# Altium PCB EFR32xG27_BLE_AGR_REF_DES_A00.PcbDoc (part 1 of 2)
Units mil, origin at the board's own origin, x right, y up, seen from the top; angles counter-clockwise.
Board outline 1488.66 x 1256.89 mil, 2 copper layers (Top Layer, Bottom Layer), stack 38.548 mil thick; 113 components, 68 nets, 277 pads, 490 vias.
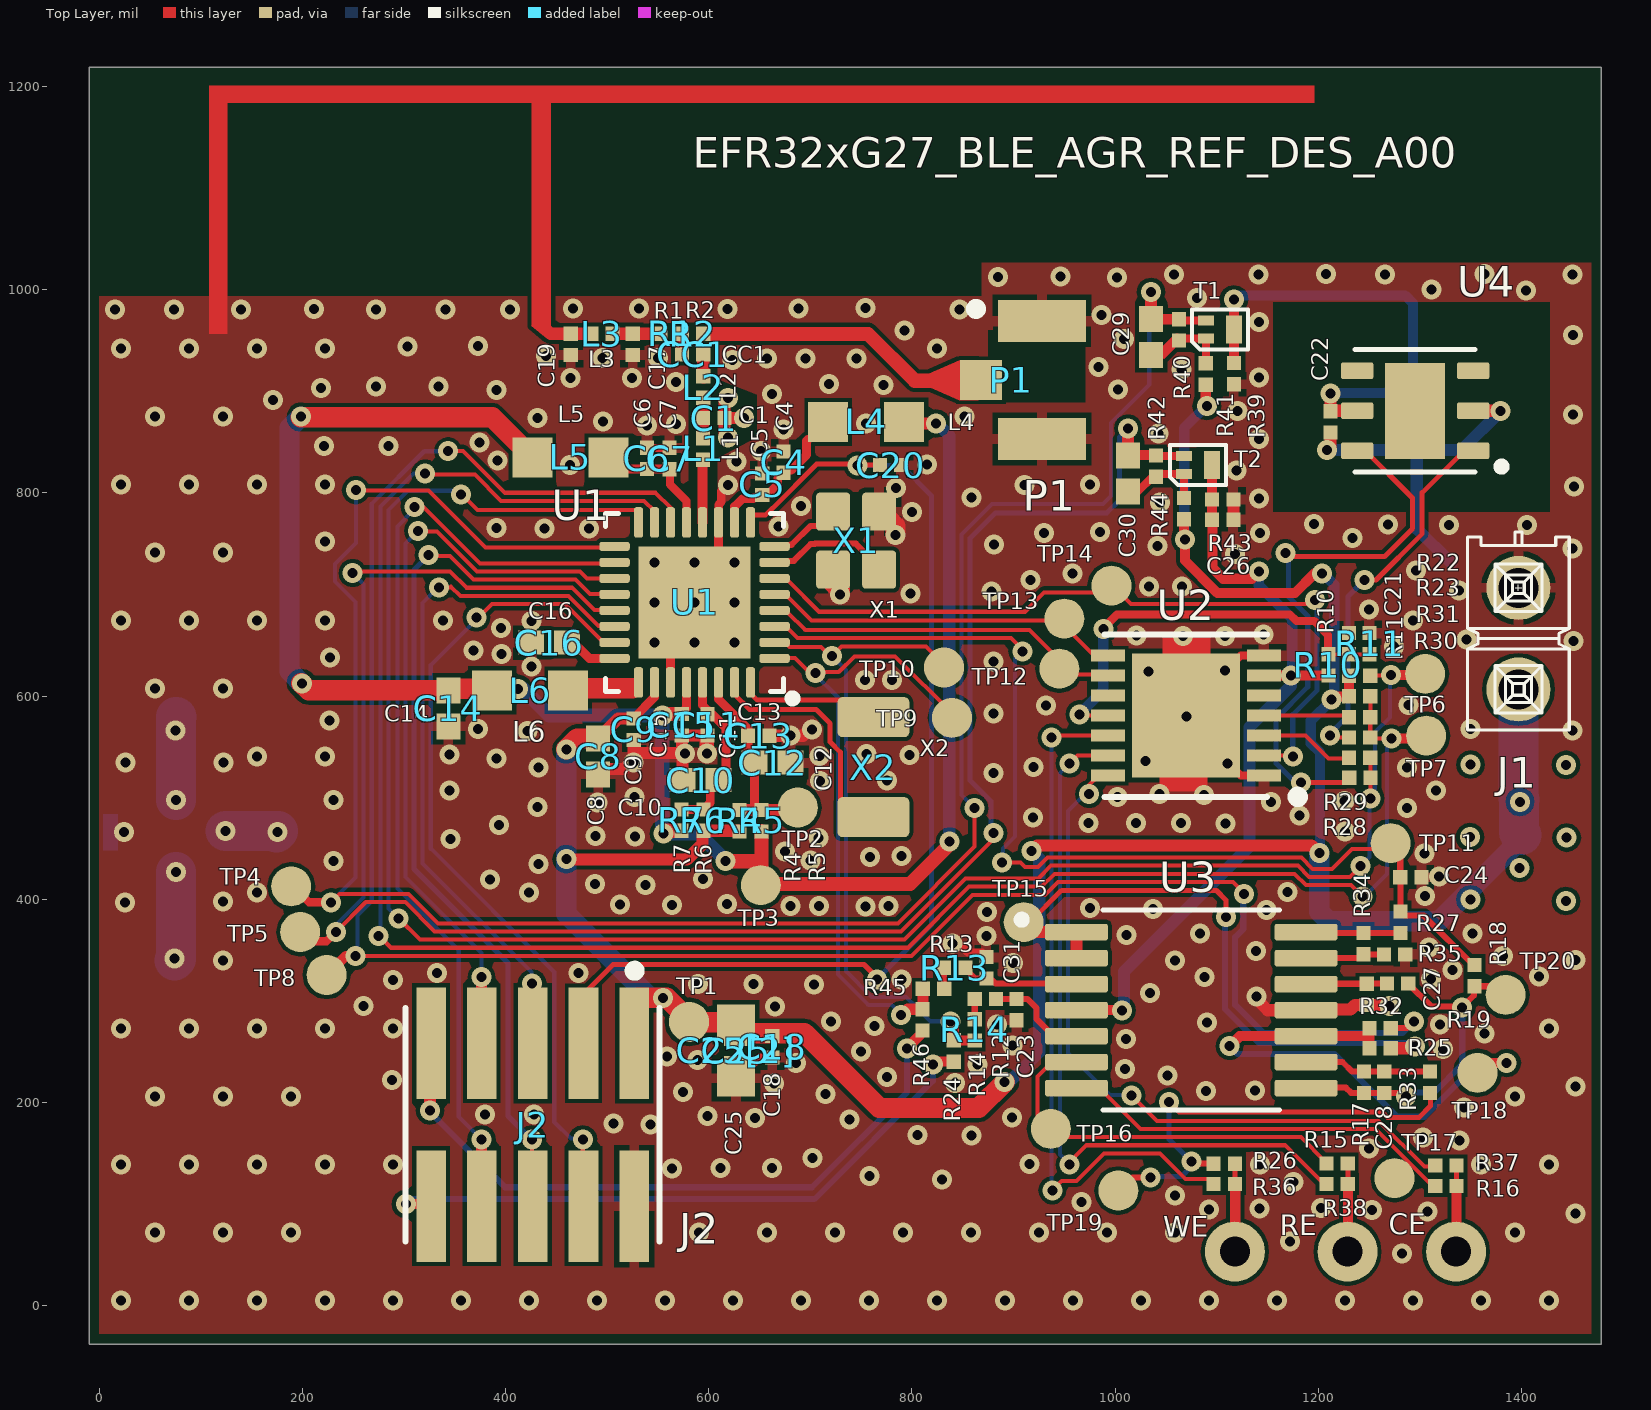
[diagram p0: Top Layer view]
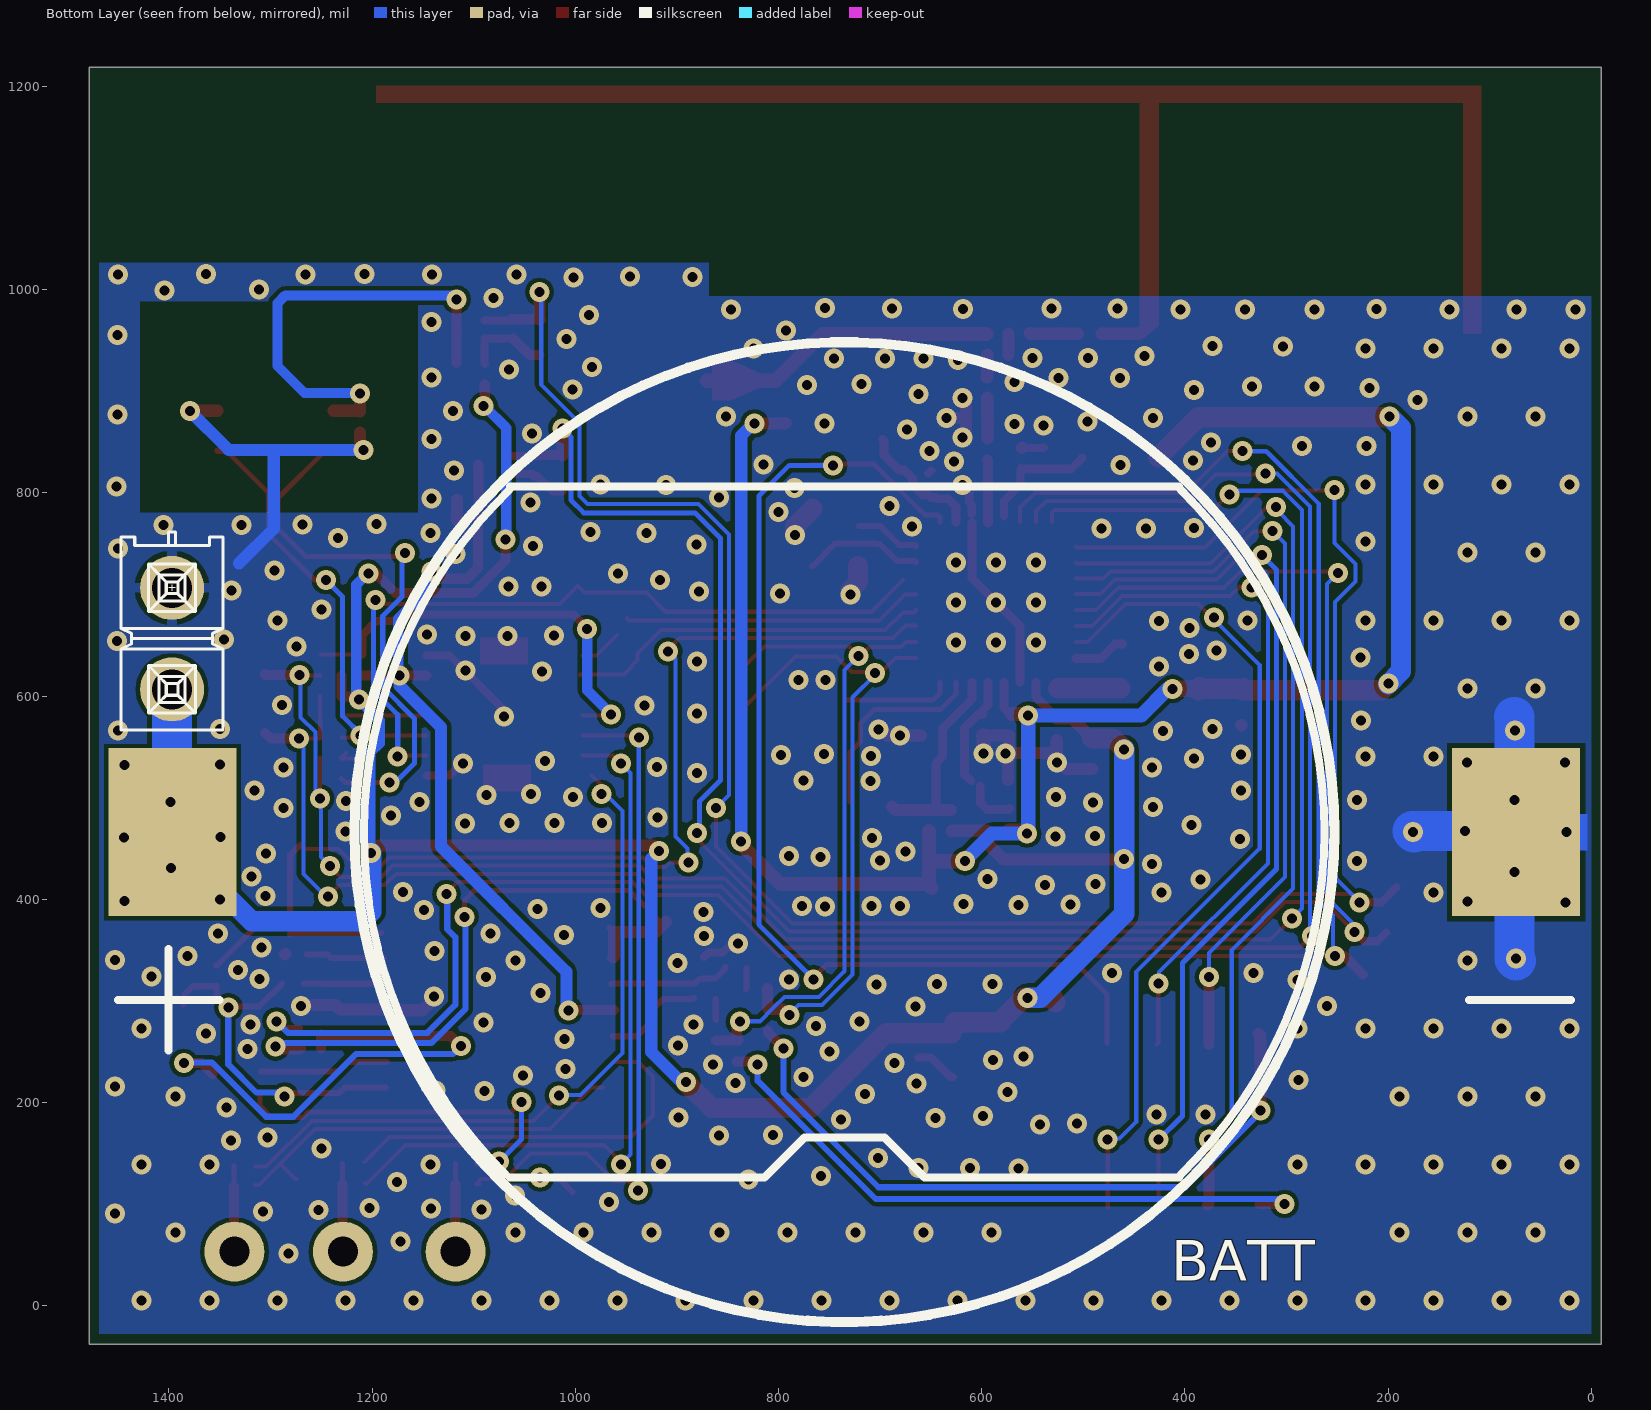
[diagram p1: Bottom Layer view, seen from below]

## Layer stack, top to bottom
Top Solder: solder mask 0.4, Solder Resist, Dk 3.5
Top Layer: signal copper 1.4
Dielectric 1: dielectric 35.748, FR-4, Dk 4.48
Bottom Layer: signal copper 1.4
Bottom Solder: solder mask 0.4, Solder Resist, Dk 3.5

## Board outline
-9.95,-37.71 -9.95,1219.18 1478.71,1219.18 1478.71,-37.71

## Design rules (kind name [scope] priority, off if disabled: settings)
AcuteAngle [All] p1: minimum=7.00000000000000E+0001 checktracksonly=FALSE
BoardOutlineClearance [All] p1: gap=0
Clearance Clearance_to_Antenna [InComponent('AT1')] p1: gap=0
Clearance Clearance_R3_R4 [InComponent('R3') vs InComponent('R4')] p2: gap=0
Clearance Clearance_to_Holes [InPadClass('NPTH')] p3: gap=10
Clearance Clearance_50Ohm [InNetClass('50Ohm') vs InNet('GND')] p4: gap=10 except(5.91: Track-SMDPad; 7.87: SMDPad-SMDPad)
Clearance Clearance_1 [All] p5: gap=4
Clearance Clerance_Polygon_GND [InNamedPolygon('GND1')] p6: gap=5
ComponentClearance ComponentClearance_C2_C7 [InComponent('C2') vs InComponent('C7')] p1: gap=0 collisioncheckmode=3 verticalgap=10 showdistances=FALSE
ComponentClearance ComponentClearance_BAT [InComponent('Designator1')] p2: gap=0 collisioncheckmode=3 verticalgap=0 showdistances=FALSE
ComponentClearance ComponentClearance_1 [InComponent('PCB1')] p3: gap=0 collisioncheckmode=3 verticalgap=0 showdistances=FALSE
ComponentClearance ComponentClearance_AT1_R14 [InComponent('AT1') vs InComponent('R14')] p4: gap=0 collisioncheckmode=3 verticalgap=0 showdistances=FALSE
ComponentClearance ComponentClearance_C6_R7 [InComponent('C6') vs InComponent('R7')] p5: gap=0 collisioncheckmode=3 verticalgap=0 showdistances=FALSE
ComponentClearance ComponentClearance_TP [HasFootprint('TP') vs HasFootprint('TP')] p6: gap=0 collisioncheckmode=3 verticalgap=0 showdistances=FALSE
ComponentClearance ComponentClearance_AT1 [InComponent('AT1')] p7: gap=0 collisioncheckmode=3 verticalgap=0 showdistances=FALSE
ComponentClearance ComponentClearance_R2_R3 [InComponent('R2') vs InComponent('R3')] p8: gap=0 collisioncheckmode=3 verticalgap=0 showdistances=FALSE
ComponentClearance ComponentClearance_R6_R7 [InComponent('R6') vs InComponent('R7')] p9: gap=0 collisioncheckmode=3 verticalgap=0 showdistances=FALSE
ComponentClearance ComponentClearance_R4_R5 [InComponent('R4') vs InComponent('R5')] p10: gap=0 collisioncheckmode=3 verticalgap=0 showdistances=FALSE
ComponentClearance [All] p11: gap=10 collisioncheckmode=3 verticalgap=10 showdistances=FALSE
HoleToHoleClearance HoleToHoleClearance_ANT1toPAD [InComponent('AT1') vs ISpad] p1: gap=0 allowstackedmicrovias=TRUE
HoleToHoleClearance HoleToHoleClearance_R3toR4_1 [Incomponent ('R3') vs Incomponent ('R4')] p2: gap=0 allowstackedmicrovias=TRUE
HoleToHoleClearance HoleToHoleClearance_U1toVIA_1 [InComponent ('U1') vs IsVia] p3: gap=0 allowstackedmicrovias=TRUE
HoleToHoleClearance [All] p4: gap=10 allowstackedmicrovias=TRUE
MinimumSolderMaskSliver MinimumSolderMaskSliver_U1 [InComponent('U1') vs InComponent('U1')] p1: minsoldermaskwidth=0
MinimumSolderMaskSliver [All] p2: minsoldermaskwidth=4
PolygonConnect PolygonConnect_ANT_GND [(InNet('gnd') AND InComponent('ANT'))] p1: connectstyle=Direct reliefconductorwidth=10 reliefentries=4 polygonreliefangle="90 Angle" airgapwidth=10
PolygonConnect Polygon_VIA_Connect [IsVia] p2: connectstyle=Direct reliefconductorwidth=10 reliefentries=4 polygonreliefangle="90 Angle" airgapwidth=10
PolygonConnect [All] p3: connectstyle=Relief reliefconductorwidth=10 reliefentries=4 polygonreliefangle="90 Angle" airgapwidth=5
RoutingVias [All] p1: holewidth=9.84 width=19.68 viastyle="Through Hole" minholewidth=9.84 minwidth=19.68 maxholewidth=39.37 maxwidth=59.06
ShortCircuit ShortCircuit_ANTtoPAD [InComponent('AT1') vs InNet('GND')] p1: allowed=TRUE
ShortCircuit ShortCircuit_R3toR4_1 [InComponent('R3') vs InComponent('R4')] p2: allowed=TRUE
ShortCircuit [All] p3: allowed=FALSE
SilkToSilkClearance [All] p1: silktosilkclearance=4
SilkToSolderMaskClearance [IsPad] p1: minsilkscreentomaskgap=4 clearancetoexposedcopper=TRUE
SolderMaskExpansion [All] p1: expansion=0
Width 50ohm [InNet('50R*')] p1: maxlimit=114.47 minlimit=3.94 preferedwidth=114.47
Width [All] p2: maxlimit=39.37 minlimit=4 preferedwidth=4.92 minimp=50.000000 maximp=50.000000 favimp=50.000000
24 further rules are at their usual default settings.

## Classes and differential pairs
polygon class GND1: "Top Layer-No Net"
component class EFR32xG27_BLE_AGR_REF_DES_A00_Sheet2: BATT C18 C21 C22 C23 C24 C25 C25[2] C26 C27 C28 C29 C30 C31 CE J1 J2 R10 R11 R12 R13 R14 R15 R16 R17 R18 R19 R22 R23 R24 R25 R26 R27 R28 R29 R30 R31 R32 R33 R34 R35 R36 R37 R38 R39 R40 R41 R42 R43 R44 R45 R46 RE T1 T2 TP3 TP4 TP5 TP6 TP7 TP8 TP9 TP10 TP11 TP12 TP13 TP14 TP15 TP16 TP17 TP18 TP19 TP20 U2 U3 U4 WE X2
component class EFR32xG27_BLE_AGR_REF_DES_A00_Sheet1: C1 C4 C5 C6 C7 C8 C9 C10 C11 C12 C13 C14 C15 C16 C17 C19 C20 CC1 L1 L2 L3 L4 L5 L6 P1 R1 R2 R4 R5 R6 R7 TP1 TP2 U1 X1

## Components (designator, comment, footprint, x,y, rotation, side; value= is the part's Value field where it differs from the comment)
BATT "BATTERY_HOLDER" BATTERY_HOLDER_CR2450_SMT_1052 735.26,466.06 r180 bottom
C1 "C1" 0201 594.44,873.7 r0 top
C4 "C4" 0201 673.61,819.72 r90 top
C5 "C5" 0201 652.71,798 r90 top
C6 "C6" 0201 539.21,823.47 r90 top
C7 "C7" 0201 561.51,823.34 r90 top
C8 "C8" C_0402 491.23,558.35 r180 top
C9 "C9" 0201 526.28,577.85 r270 top
C10 "C10" C_0402 609.64,517.34 r90 top
C11 "C11" 0201 598.71,582.19 r270 top
C12 "C12" C_0402 645.1,534.55 r270 top
C13 "C13" 0201 638.7,560.91 r0 top
C14 "C14" C_0402 343.69,605.62 r180 top
C15 "C15" 0201 573.46,582.29 r270 top
C16 "C16" C_0402 460.62,652.59 r90 top
C17 "C17" 0201 525.15,956.62 r270 top
C18 "C18" 0201 662.58,265.35 r270 top
C19 "C19" 0201 464.3,956.62 r270 top
C20 "" 0201 768.46,827.34 r0 top
C21 "C21" 0201 1230.24,641.13 r90 top
C22 "C22" 0201 1211.87,880.34 r270 top
C23 "C23" 0201 902.92,301.95 r270 top
C24 "C24" 0201 1280.65,421.72 r0 top
C25 "C25" C_0402 627.07,268.5 r180 top (schematic designator C25[1])
C25[2] "" C_0603 626.84,278.83 r270 top
C26 "C26" 0201 1095.44,773.63 r0 top
C27 "C27" 0201 1247.59,295.89 r90 top
C28 "C28" 0201 1264.84,230.42 r270 top
C29 "C29" C_0402 1035.52,935.59 r0 top
C30 "C30" C_0402 1012.78,801.38 r0 top
C31 "C31" 0201 873.32,322.08 r90 top
CC1 "CC1" 0201 594.59,936.22 r180 top
CE "Sensor Electrode" "Sensor Electrode"#1 1325.53,44.4 r0 top
J1 "J1" JUMPER_HDR_2.54MM 1397,706.54 r270 top
J2 "J2" SMTC-FTSH-105-01-L-DV-K_V 426.72,178.11 r180 top
L1 "L1" 0201 594.44,832.71 r90 top
L2 "L2" 0201 594.53,893.7 r90 top
L3 "L3" 0201 505.42,956.6 r180 top
L4 "L4" L_0603 792.38,869.82 r270 top
L5 "L5" L_0603 426.37,834.9 r90 top
L6 "L6" L_0603 461.59,605.66 r270 top
P1 "P1" TECO-1909763-1_V 928.01,911.05 r270 top
R1 "R1" 0201 573.58,956.66 r180 top
R2 "R2" 0201 573.6,956.67 r0 top
R4 "R4" 0201 630.21,466.85 r90 top
R5 "R5" 0201 652.03,466.86 r90 top
R6 "R6" 0201 594.84,467.4 r90 top
R7 "R7" 0201 573.18,467.45 r90 top
R10 "R10" 0201 1209.97,641.14 r270 top
R11 "R11" 0201 1250.4,662.12 r270 top
R12 "R12" 0201 861.85,301.98 r0 top
R13 "R13" 0201 831.7,332.52 r0 top
R14 "R14" 0201 861.74,261 r90 top
R15 "R15" 0201 1208.04,139.85 r0 top
R16 "R16" 0201 1314.99,117.9 r0 top
R17 "R17" 0201 1244.96,230.45 r270 top
R18 "R18" 0201 1353.61,314.38 r90 top
R19 "R19" 0201 1288.6,317.01 r180 top
R22 "R22" 0201 1251.14,620.08 r180 top
R23 "R23" 0201 1251.15,599.84 r180 top
R24 "R24" 0201 841.11,261.2 r270 top
R25 "R25" 0201 1271.3,253.37 r180 top
R26 "R26" 0201 1096.97,139.8 r0 top
R27 "R27" 0201 1280.89,366.93 r90 top
R28 "R28" 0201 1251.34,519.72 r180 top
R29 "R29" 0201 1251.2,539.3 r180 top
R30 "R30" 0201 1251.1,559.19 r180 top
R31 "R31" 0201 1251.1,579.27 r180 top
R32 "R32" 0201 1271.31,273.18 r180 top
R33 "R33" 0201 1309.8,209.4 r90 top
R34 "R34" 0201 1244.58,345.92 r90 top
R35 "R35" 0201 1285.61,345.67 r180 top
R36 "R36" 0201 1096.97,119.7 r0 top
R37 "R37" 0201 1314.99,138.08 r0 top
R38 "R38" 0201 1208.06,119.82 r0 top
R39 "R39" 0201 1116.93,906.9 r90 top
R40 "R40" 0201 1062.93,970.9 r270 top
R41 "R41" 0201 1089.27,927.54 r270 top
R42 "R42" 0201 1040.15,836.94 r270 top
R43 "R43" 0201 1116.41,793.6 r180 top
R44 "R44" 0201 1067.92,795.04 r270 top
R45 "R45" 0201 810.75,311.92 r0 top
R46 "R46" 0201 810.55,291.79 r270 top
RE "Sensor Electrode" "Sensor Electrode"#2 1218.78,47.68 r0 top
T1 "T1" SOT883_B_FIXED 1103.23,960.69 r0 top
T2 "T2" SOT883_B_FIXED 1081.63,827.38 r0 top
TP1 "TP_SMD" TP#1 580.64,279.3 r90 top
TP2 "TP_SMD" TP#2 643.45,515.52 r90 bottom
TP3 "TP_SMD" TP#1 651.23,413.97 r90 top
TP4 "TP_SMD" TP#1 189.09,412.73 r180 top
TP5 "TP_SMD" TP#1 197.89,367.76 r180 top
TP6 "TP_SMD" TP#1 1305.24,621.86 r180 top
TP7 "TP_SMD" TP#1 1306.17,561.05 r90 top
TP8 "TP_SMD" TP#1 223.95,325.53 r90 top
TP9 "TP_SMD" TP#1 839.43,578.62 r90 top
TP10 "TP_SMD" TP#1 831.55,628.09 r90 top
TP11 "TP_SMD" TP#1 1271.18,455.27 r90 top
TP12 "TP_SMD" TP#1 945.03,627 r90 top
TP13 "TP_SMD" TP#1 950.02,676.28 r90 top
TP14 "TP_SMD" TP#1 996.38,708.63 r90 top
TP15 "TP_SMD" TP#1 910.07,377.48 r90 top
TP16 "TP_SMD" TP#1 936.73,174.1 r90 top
TP17 "TP_SMD" TP#1 1275.02,125.56 r90 top
TP18 "TP_SMD" TP#1 1356.7,229.23 r90 top
TP19 "TP_SMD" TP#1 1003.18,113.31 r90 top
TP20 "TP_SMD" TP#1 1384.33,305.96 r90 top
U1 "U1" EFR_QFN32 586.06,692.21 r180 top
U2 "U2" SON50P400X400X80-15N 1069.7,580.83 r180 top
U3 "U3" SOP65P640X120-14N 1074.96,290.92 r0 top
U4 "U4" SON100P300X300X121-7N 1295.3,880.84 r180 top
WE "Sensor Electrode" "Sensor Electrode"#3 1107.83,48.18 r0 top
X1 "X1" HFXO_TZ2205E 767.77,724.46 r90 top
X2 "X2" LFXO 762.09,530.03 r270 top

## Footprints (in the part's own frame and the unit in brackets; to place one, negate y for a bottom-side part, rotate by r counter-clockwise, add the part's x,y. Pads: shape width x height; smd on the part's side, far side on the other; paste and mask are expansions set on the pad)
0201 [mil]
  rect 14x14 smd: 1(0,0) 2(21,0)
  body extent 1,-5 21,5, height 10
BATTERY_HOLDER_CR2450_SMT_1052 [mm] "CR2450 Battery Holder"
  rect 3.2x4.2 smd: 1(-16.795,0) 2(16.795,0)
  silkscreen extent -18.16,-12.25 18.16,12.25, body extent -13.46,-8 13.46,7.97, height 4.8
C_0402 [mm]
  rect 0.6x0.65 smd: 1(0,0) 2(0,0.9)
  body extent -0.28,-0.05 0.28,0.97, height 1.02
C_0603 [mm]
  rect 0.9x0.95 smd: 1(0,0) 2(1.4,0)
  body extent -0.09,-0.39 1.51,0.39, height 0.89
EFR_QFN32 [mm]
  rect 2.8x2.8 smd: 0(0,0)
  rrect50% 0.76x0.22 smd: 1(-2,1.4) 2(-2,1) 3(-2,0.6) 4(-2,0.2) 5(-2,-0.2) 6(-2,-0.6) 7(-2,-1) 8(-2,-1.4) 17(2,-1.4) 18(2,-1) 19(2,-0.6) 20(2,-0.2) 21(2,0.2) 22(2,0.6) 23(2,1) 24(2,1.4)
  rrect50% 0.22x0.76 smd: 9(-1.4,-2) 10(-1,-2) 11(-0.6,-2) 12(-0.2,-2) 13(0.2,-2) 14(0.6,-2) 15(1,-2) 16(1.4,-2) 25(1.4,2) 26(1,2) 27(0.6,2) 28(0.2,2) 29(-0.2,2) 30(-0.6,2) 31(-1,2) 32(-1.4,2)
  silkscreen extent -2.53,-2.22 2.22,2.48, body extent -2.08,-2.07 2.07,2.08, height 1
HFXO_TZ2205E [mm]
  rrect20% 0.95x0.85 smd: 1(1.45,1.15) 2(1.45,0) 3(0,0) 4(0,1.15)
  body extent -0.37,-0.28 1.75,1.45, height 0.5
JUMPER_HDR_2.54MM [mm] "No 3D model for this component"
  round 1.6 hole 1: 1(0,0) 2(2.54,0)
  silkscreen extent -1.4,-1.27 3.55,1.27
L_0603 [mm]
  rect 1x1 smd: 1(0,0) 2(0,-1.9)
  body extent -0.39,-1.74 0.39,-0.14, height 0.89
LFXO [mm]
  rrect25% 1x1.8 smd: 1(-1.25,0) 2(1.25,0)
  body extent -1.6,-0.75 1.6,0.75, height 0.95
"Sensor Electrode"#1 [mm]
  round 1.5 hole 0.75: 1(0.254,0.223)
"Sensor Electrode"#2 [mm]
  round 1.5 hole 0.75: 1(0.254,0.14)
"Sensor Electrode"#3 [mm]
  round 1.5 hole 0.75: 1(0.254,0.127)
SMTC-FTSH-105-01-L-DV-K_V [mm] "CONN, 10-Leads, Body 6.35x3.43mm, Pitch 1.27mm"
  rect 0.74x2.79 smd: 1(-2.54,-2.035) 2(-2.54,2.035) 3(-1.27,-2.035) 4(-1.27,2.035) 5(0,-2.035) 6(0,2.035) 7(1.27,-2.035) 8(1.27,2.035) 9(2.54,-2.035) 10(2.54,2.035)
  silkscreen extent -3.18,-3.97 3.18,2.92, body extent -3.17,-2.92 3.18,2.92, height 6.12
SON50P400X400X80-15N [mm]
  rect 0.85x0.3 smd: 1(-1.95,1.5) 2(-1.95,1) 3(-1.95,0.5) 4(-1.95,0) 5(-1.95,-0.5) 6(-1.95,-1) 7(-1.95,-1.5) 8(1.95,-1.5) 9(1.95,-1) 10(1.95,-0.5) 11(1.95,0) 12(1.95,0.5) 13(1.95,1) 14(1.95,1.5)
  rect 2.7x3.1 smd: 15(0,0)
  silkscreen extent -2.92,-2.03 2.03,2.16, body extent -2,-2 2,2, height 0.8
SON100P300X300X121-7N [mm]
  rrect25% 0.81x0.42 smd: 1(-1.45,1) 2(-1.45,0) 3(-1.45,-1) 4(1.45,-1) 5(1.45,0) 6(1.45,1)
  rect 1.5x2.4 smd paste-2: 7(0,0)
  silkscreen extent -2.26,-1.53 1.5,1.53
SOP65P640X120-14N [mm]
  rrect25% 1.57x0.41 smd: 1(-2.87,1.95) 2(-2.87,1.3) 3(-2.87,0.65) 4(-2.87,0) 5(-2.87,-0.65) 6(-2.87,-1.3) 7(-2.87,-1.95) 8(2.87,-1.95) 9(2.87,-1.3) 10(2.87,-0.65) 11(2.87,0) 12(2.87,0.65) 13(2.87,1.3) 14(2.87,1.95)
  silkscreen extent -4.34,-2.5 2.2,2.5
SOT883_B_FIXED [mm] "SOT883_B_FIXED"
  rect 0.4x0.7 smd: D(0.35,0)
  rect 0.4x0.25 smd: G(-0.35,0.225) S(-0.35,-0.225)
  silkscreen extent -0.7,-0.5 0.7,0.5
TECO-1909763-1_V [mm] "SMD, 3-Leads, Body 2.6x2.6mm, Height 1.25mm"
  rect 1.05x2.2 smd: 1(-1.475,0) 3(1.475,0)
  rect 1x1.05 smd: 2(0,-1.525)
  silkscreen extent -1.9,-1.77 -1.65,-1.52, body extent -1.5,-1.55 1.5,1.55, height 1.23
TP#1 [mm]
  round 1 smd: 1(0,0)
TP#2 [mm]
  round 1 smd far side: 1(-0.64,1.123)

## Part data
BATT: library part 1052TR, "2450 SMT battery holder 1052"
C1 C4 C5 C6 C7 C8 C9 C10 C11 C12 C13 C14 C15 C16 C17 C18 C19 C20 C21 C22 C23 C24 C25 C25[2] C26 C27 C28 C29 C30 C31 CC1: library part C0201, "Ceramic capacitor"
CE RE WE: "Footprint for external sensor electrode"
J1: library part HTSW-102-28-F-S, "CONN HEADER VERT 2POS 2.54MM"
J2: library part CMP-2000-05352-1, "10-pin mini-simplicity header"
L1 L2 L3: library part L0201, "Chip Inductor"
L4 L5 L6: library part L0201, "Ferrite Bead"
P1: library part CN-1P-M-RF3, "SMT Ultra Miniature Coaxial Connector 50-ohm Jack, Female"
R1 R2 R4 R5 R6 R7 R10 R11 R12 R13 R14 R15 R16 R17 R18 R19 R22 R23 R24 R25 R26 R27 R28 R29 R30 R31 R32 R33 R34 R35 R36 R37 R38 R39 R40 R41 R42 R43 R44 R45 R46: library part R0201, "zero ohm resistor"
T1 T2: library part PMZ350UPEYL, "P-Channel Trench MOSFET 20V 1A (Ta) 360mW (Ta), 3.125W (Tc) Surface Mount DFN1006-3"
U1: library part EFR32xG22-2.4GHZ-QFN32, "32-pin Wireless MCU, EFR32xG27 with buck converter"
U2: library part LMP91000SDE, "Analog AFE Integrated Circuit"
U3: library part OPA4991_4-ch, "4-channel OpAmp Integrated Circuit"
U4: library part SI7021-A10-GM, "Board Mount Humidity and Temperature sensor"
X1: library part HFXO, "38.4 MHz high frequency crystal"
X2: library part LFXO, "32.768 kHz low frequency crystal"

## Via types
v1: diameter 19.68, hole 9.84, Top Layer to Bottom Layer, tented both sides, 413 vias
v2: diameter 19.68/19.68 (per signal layer), hole 9.84, Top Layer to Bottom Layer, tented both sides, 77 vias

## Nets (pads, with @x,y where several pads share a name; then routed paths per layer and width w, separated by ;. In a path a pad name is that pad's centre, name@x,y a point inside that pad or via, vN(x,y) a via of type N, cw(c..) or ccw(c..) an arc to the next point about the centre after c; other vN are vias at no path point)
AVDD: C10.1 C11.1 R6.2 R7.2 U1.29 | length 157.5
  Top Layer w8.66: R7.2@572.78,489.25 573.63,488.4 R6.2@594.84,488.4 601.53,495.09 C10.1@601.53,511.67 ; U1.29@593.94,613.47 593.94,591.21 599.35,585.8 C11.1@599.35,584.84 ; C11.1@598.71,582.19 603.49,582.19 616.88,568.8 616.88,522.82 C10.1@610.92,516.86
CE: R37.1 U2.14 | length 695.9
  Top Layer w4: v1(974.49,503.61) 974.49,512.27 U2.14@984.17,521.95 ; v1(1016.25,206.92) 1041.23,181.94 1259.43,181.94 1304.56,136.81 R37.1@1315.25,136.81
  Bottom Layer w4: v1(974.49,503.61) 970.4,503.61 953.6,486.81 953.6,248.71 995.06,207.25 v1@1015.97,207.25
EFR32_PA00: C29.2 R40.1 T1.G TP4.1 U1.17 | length 2208.6
  Top Layer w4: v1(228.31,397.08) 236.41,405.18 304.65,405.18 333.53,376.3 786.13,376.3 861.58,451.75 v1@861.58,490.47 ; v1@254.01,803.29 254.9,802.4 324.01,802.4 380.23,746.18 506.17,746.18 U1.17@507.32,747.33
  Top Layer w8: TP4.1@191.65,412.09 206.66,397.08 v1(228.31,397.08) ; R40.1@1062.76,971.61 1064.82,969.55 T1.G@1089.45,969.55
  Top Layer w10: C29.2@1035.73,971.03 1035.86,970.9 R40.1@1062.93,970.9
  Top Layer w12: C29.2@1035.08,970.77 1035.35,971.04 v1(1035.35,997.72)
  Bottom Layer w4: v1@228.27,397.2 252.31,421.24 252.31,692.42 232.1,712.63 232.1,729.96 252.67,750.53 v1(252.67,802.67) ; v1(861.44,489.75) 848.75,502.44 848.75,758.91 878.72,788.88 987.89,788.88 995.75,796.74 995.75,868.85 1033.62,906.72 1033.62,997.04 v1@1035.37,998.79
EFR32_PA01: J2.8 U1.18 | length 952.7
  Top Layer w4: v1@317.96,788.95 317.96,787.76 375.07,730.65 506.39,730.65 U1.18@507.32,731.58
  Top Layer w11: J2.8@377.65,99.02 376.47,100.2 v1(376.47,163.46) v1@378.94,163.46
  Bottom Layer w4: v1(310.29,786.24) 313.58,786.24 308.91,781.58 308.1,781.58 293.51,766.99 293.51,410.62 353.95,350.18 353.95,186.22 v1@375.94,164.23 ; v1(376.47,163.46) 378.65,163.46 v1@378.8,163.61
EFR32_PA02: J2.7 U1.19 | length 752.8
  Top Layer w4: v1@314.09,762.03 332.37,762.03 371.75,722.65 473.33,722.65 480.15,715.83 U1.19@507.32,715.83
  Top Layer w11: J2.7@376.28,257.39 376.48,257.59 v1(376.48,323.48)
  Bottom Layer w4: v1(313.71,762.56) 301.51,750.36 301.51,421.94 376.46,346.99 v1@376.46,324.41
EFR32_PA03: J2.6 U1.20 | length 898.1
  Top Layer w4: v1(324.4,738.68) v1@328.3,738.68 ; v1@324.54,737.82 345.27,737.82 368.44,714.65 468.7,714.65 483.05,700.3 U1.20@507.17,700.3 ; v1(425.99,163.46) 425.99,97.58 J2.6@426.47,97.1
  Bottom Layer w4.92: v1(324.4,738.68) 309.97,724.25 309.97,429.74 402.48,337.24 402.48,186.7 v1@425.98,163.2
EFR32_PA04: C30.2 R42.1 T2.G TP5.1 U1.21 | length 2012.9
  Top Layer w4: v1(233.21,367.96) 262.43,397.18 301.33,397.18 330.21,368.3 789.44,368.3 880.37,459.23 v1@880.37,465.77 ; v1@250.82,721.33 252.32,722.83 345.3,722.83 361.48,706.65 465.39,706.65 487.49,684.55 U1.21@507.17,684.55
  Top Layer w8: TP5.1@201.89,367.44 210.61,358.72 223.97,358.72 v1(233.21,367.96) ; R42.1@1040.15,837.19 1041.1,836.24 T2.G@1067.85,836.24
  Top Layer w10: C30.2@1013.33,837.28 1039.81,837.28 R42.1@1040.15,836.94
  Top Layer w12: C30.2@1012.78,836.82 v1(1012.78,863.48)
  Bottom Layer w4: v1@234.26,367.88 234.26,375.81 260.31,401.86 260.31,710.18 v1(249.41,721.08)
  Bottom Layer w5: v1@880.25,465.69 877.78,468.16 877.78,496.52 857.25,517.05 857.25,755.39 882.24,780.38 991.78,780.38 1004.25,792.85 1004.25,854.78 v1@1012.7,863.23
  other v1: 880.23,465.1
EFR32_PA05: J2.5 U1.22 | length 684.5
  Top Layer w4: v1(334.35,706.99) 345.79,706.99 346.41,707.61 355.51,698.51 462,698.51 491.7,668.81 U1.22@507.17,668.81 ; v1(426.28,317.04) 426.28,258.75 J2.5@427.83,257.2
  Bottom Layer w4: v1(334.35,706.99) 333.73,706.99 318.43,691.69 318.43,435.36 425.47,328.32 v1@425.47,323.38
EFR32_PA06: J2.4 U1.23 | length 823.9
  Top Layer w4: v1(371.4,677.37) 373.44,677.37 386.6,690.51 458.68,690.51 496.14,653.06 U1.23@507.17,653.06 ; v1(476.03,163.71) 476.03,97.01 J2.4@476.36,96.68
  Bottom Layer w4: v1(371.4,677.37) 371.4,675.57 326.43,630.6 326.43,449.76 447.97,328.22 447.97,180.97 464.46,164.48 v1@475.76,164.48
EFR32_PB00: R22.1 R28.1 R29.1 TP6.1 U1.16 | length 1968.3
  Top Layer w4: v1(294.77,381.34) 315.81,360.3 792.76,360.3 852.89,420.44 924.35,420.44 936.96,433.05 1179.92,433.05 1191.04,421.93 1231.25,421.93 v1@1241.15,431.83 ; v1@355.62,799.85 372.25,783.22 528.49,783.22 530.79,780.92 U1.16@530.79,771.17 ; R22.1@1251.14,620.08 1270.25,620.08 v1@1271.87,621.7 ; R29.1@1251.2,539.3 1251.2,518.42 1251.34,518.28 v1@1251.34,499.3
  Top Layer w10: v1(1271.52,620.82) 1305.32,620.82 TP6.1@1306.04,621.54
  Bottom Layer w4: v1@294.36,381.52 284.77,391.11 284.77,783.13 303.73,802.09 353.54,802.09 v1@355.21,800.42 ; v1(1241.39,432.89) 1250.28,441.78 v1@1250.28,499.02 ; v1@1251.38,499.57 1255.99,504.18 1255.99,564.64 1270.46,579.11 v1@1270.46,622.57
  other v1: 1251.44,499.3 356.03,798.57
EFR32_PB01: R23.1 R30.1 R31.1 TP7.1 U1.15 | length 2010
  Top Layer w4: v1@275.47,364.16 287.33,352.3 796.07,352.3 856.21,412.44 927.66,412.44 940.27,425.05 1176.61,425.05 1187.73,413.93 1232.15,413.93 v1(1243.31,402.77) ; v1@321.5,820.2 323.61,818.09 369.8,818.09 395.76,792.13 536.41,792.13 546.54,781.99 U1.15@546.54,771.17 ; R30.1@1250.72,559.01 1251.55,558.18 v1(1271.93,558.18) ; R30.1@1251.1,560.57 R31.1@1251.1,579.27 ; R23.1@1251.1,600.18 R23.1@1251.86,599.42 ; R23.1@1251.15,599.84 1251.15,578.55 R31.1@1251.25,578.45
  Top Layer w10: v1(1271.93,558.18) 1299.95,558.18 TP7.1@1305.47,563.7
  Bottom Layer w4: v1@273.96,365.08 276.77,367.89 276.77,786.44 309.26,818.93 v1(320.9,818.93) ; v1@1245.52,402.58 1267.71,424.77 1267.71,555.03 v1@1271.84,559.16
  other v1: 275.04,363.73
EFR32_PB02: R32.1 TP8.1 U1.14 | length 2077.8
  Top Layer w4: v1(252.39,344.3) 799.38,344.3 859.52,404.44 930.97,404.44 943.59,417.05 1115.93,417.05 v1@1127.51,405.47 ; v1@343.67,841.31 358.27,841.31 399.45,800.13 547.7,800.13 562.29,785.54 U1.14@562.29,771.17
  Top Layer w6: R32.1@1271.31,273.18 1287.21,273.18 v1@1294.46,280.43
  Top Layer w10: TP8.1@224.75,326.06 242.99,344.3 v1(252.39,344.3)
  Bottom Layer w4: v1@254.46,346.71 254.46,383.84 268.31,397.69 268.31,789.3 320,840.99 v1(343.47,840.99)
  Bottom Layer w6: v1@1126.85,405.84 1126.15,405.14 1126.15,370.67 1118.18,362.7 1118.18,296.13 1145.79,268.52 1282.96,268.52 v1@1294.18,279.74
  other v1: 1294.11,279.81 1126.92,405.18
EFR32_PC00: R45.1 R46.1 TP9.1 U1.1 | length 639.9
  Top Layer w4: U1.1@664.65,637.31 684.79,637.31 699.56,622.55 v1@703.04,622.55 ; v1(704.87,622.56) 705.99,623.68 727.98,623.68 743.48,639.18 783.36,639.18 840.29,582.25 TP9.1@840.29,578.62
  Top Layer w11: v1@790.55,286.84 795.5,291.79 R46.1@810.55,291.79 ; R46.1@810.37,292.04 810.75,292.42 R45.1@810.75,311.92
  Bottom Layer w4: v1@704.15,621.9 727.19,598.86 727.19,325.89 757.04,296.04 780.25,296.04 v1@789.3,286.99
  other v1: 789.48,286.25
EFR32_PC01: R14.1 R24.1 TP10.1 U1.2 | length 664
  Top Layer w4: U1.2@664.65,653.06 674.5,653.06 679.32,648.23 710.52,648.23 719.23,639.52 v1(721.42,639.52) 730.89,648.99 814.05,648.99 TP10.1@832.61,630.43
  Top Layer w10: v1@838.58,279.92 841.11,277.39 R24.1@841.11,261.2 ; R24.1@839.39,261.38 839.77,261 R14.1@861.74,261
  Bottom Layer w4: v1@723.38,637.28 735.19,625.47 735.19,329.21 760.36,304.04 794.09,304.04 805.32,292.81 818.18,279.95 v1@838.34,279.95
  other v1: 838.12,279.58
EFR32_PC02: C24.1 R18.2 R27.2 TP11.1 U1.3 | length 1038.4
  Top Layer w4: U1.3@664.65,668.81 665.17,669.33 674.96,669.33 687.29,656.99 897.46,656.99 909.02,645.43 v1@910.65,645.43 ; v1@889.77,436.2 906.69,436.2 911.18,431.71 924.3,431.71 933.64,441.05 1183.24,441.05 1194.36,429.93 1213.44,429.93 1233.01,449.5 1267.8,449.5 TP11.1@1271.67,453.37 ; TP11.1@1270.88,454.17 TP11.1@1272.64,452.4
  Top Layer w6: TP11.1@1272.33,452.09 1280.65,443.77 C24.1@1280.65,421.72 ; C24.1@1280.86,421.12 C24.1@1281.52,421.78 ; C24.1@1280.89,420.79 R27.2@1280.89,387.93 1284.88,383.94 1303.9,383.94 1352.73,335.11 R18.2@1353.45,335.11
  Bottom Layer w4: v1@889.74,436.06 889.74,450.07 901.61,461.94 901.61,637 v1(908.6,643.99)
  other v1: 888.86,436.28
EFR32_PC03: TP12.1 U1.4 U2.9 | length 359
  Top Layer w4.02: U1.4@664.65,684.55 666.88,682.33 677.71,682.33 695.03,665 915.78,665 938.98,641.8 938.98,635.31 TP12.1@943.87,630.42 ; TP12.1@944.81,628.43 952.09,621.15 995.11,621.15 U2.9@995.29,620.97
EFR32_PC04: TP13.1 U1.5 U2.8 | length 338.2
  Top Layer w4: U1.5@664.8,700.08 675.56,700.08 701.21,674.44 946.95,674.44 TP13.1@949.14,676.63 ; TP13.1@959,660.24 979.35,639.88 U2.8@992.93,639.88
EFR32_PC05: TP14.1 U1.6 U2.2 | length 738.2
  Top Layer w4: U1.6@677.45,714.08 708.52,683.01 911.26,683.01 930.22,701.97 990.88,701.97 TP14.1@997.25,708.34 ; TP14.1@997.68,708.48 1015.71,690.45 v1@1192.43,690.45 ; U2.2@1146.47,541.46 v1@1174.74,541.46
  Bottom Layer w5: v1(1174.85,540.53) 1174.85,581.62 1198.57,605.34 1198.57,693.57 v1@1197.35,694.79
  other v1: 1196.83,694.59
EFR32_PD00: U1.32 X2.1 | length 105.2
  Top Layer w4.92: U1.32@641.03,613.69 641.03,602.86 647.92,595.97 X2.1@732.57,595.97
EFR32_PD01: U1.31 X2.2 | length 199.6
  Top Layer w4.92: U1.31@625.28,613.69 625.28,601.88 640.11,587.05 705.53,587.05 719.37,573.21 719.37,555.03 729.61,544.79 X2.2@729.61,495.58
EFR32_RESET: C20.1 J2.3 U1.9 | length 1094.4
  Top Layer w4.92: J2.3@476.72,258.23 476.72,306.55 506.01,335.84 752.84,335.84 v1@766.68,322 ; U1.9@641.18,770.95 641.18,776.22 643.05,778.09 655.77,778.09 662.22,784.54 662.39,784.54 706.22,828.37 v1@748.08,828.37 ; v1@747.57,827.86 748.09,827.34 C20.1@768.46,827.34
  Bottom Layer w4.92: v1@746.63,827.07 789.36,827.07 819.46,796.97 819.46,374.96 v1@765.65,321.15
  other v1: 765.55,321.25 746.54,826.83
EIS_CE: R16.1 TP17.1 U3.7 | length 403.4
  Top Layer w4: U3.7@972.98,214.81 984.26,214.81 1025.13,173.94 1256.12,173.94 1311.32,118.74 R16.1@1315.18,118.74 ; TP17.1@1274.03,124.85 1275.47,124.85 1289.57,138.95
EIS_RE: R15.1 TP16.1 U3.6 | length 383.2
  Top Layer w4: TP16.1@936.15,174.68 923.74,187.09 923.74,225.48 938,239.74 U3.6@961.97,239.74 ; TP16.1@937.5,173.71 945.27,165.94 1182.89,165.94 R15.1@1207.3,141.53
EIS_WE: R26.1 R33.1 TP19.1 | length 458.2
  Top Layer w5: v1(1053.13,200.65) 1063.07,190.71 1262.68,190.71 1268.28,185.11 1298.86,185.11 1310.24,196.49 R33.1@1310.24,208.85
  Top Layer w6: TP19.1@1002.72,111.62 1017.33,126.23 v1(1034.7,126.23) ; v1@1075.43,142.16 1077.79,139.8 R26.1@1096.97,139.8
  Bottom Layer w5: v1@1035.33,127.61 1035.77,127.17 1065.33,127.17 1075.02,136.86 v1@1075.02,141.89 ; v1(1053.13,200.65) 1053.13,163.79 v1@1075.02,141.89 ; v1(1075.23,142.1) v1@1075.02,141.89
FEM_SCL: R29.2 U2.3 | length 101.2
  Top Layer w4: U2.3@1146.47,561.14 1187.59,561.14 1210.1,538.63 1230.49,538.63 R29.2@1231.07,539.21 ; R29.2@1225.6,544.18 R29.2@1230.57,539.21
FEM_SDA: R31.2 U2.4 | length 84
  Top Layer w4: U2.4@1146.47,580.83 1219.54,580.8 1228.19,580.83 R31.2@1229.76,579.26
FEM_VCC: C26.1 R10.2 R43.2 T2.D U2.6 U3.4 | length 778.8
  Top Layer w10: U3.4@961.97,290.92 v1@1006.52,290.92 ; C26.1@1095.19,773.18 1095.41,773.4 R43.2@1095.41,793.6 T2.D@1095.41,827.38 1095.41,827.6 T2.D@1095.79,827.98 ; C26.1@1096.06,774.11 1095.74,773.79 1095.74,726.17 1106.46,715.45 1134.68,715.45 v1@1141.55,722.32 ; U2.6@1146.47,620.2 v1@1173.09,620.2 ; v1@1173.13,621.11 1174.1,620.14 R10.2@1209.97,620.14
  Bottom Layer w10: v1(1141.4,722.54) 1141.4,708.98 1174.36,676.02 v1@1174.36,620.87
  Bottom Layer w12: v1@1006.61,290.98 1008.87,293.24 1008.87,328.72 1132.13,451.98 1132.13,569.31 1173.04,610.22 v1@1173.04,620.87
  other v1: 1006.85,290.68 1173.23,620.32